# EAGLE board zero_board (EAGLE 9.6.2)
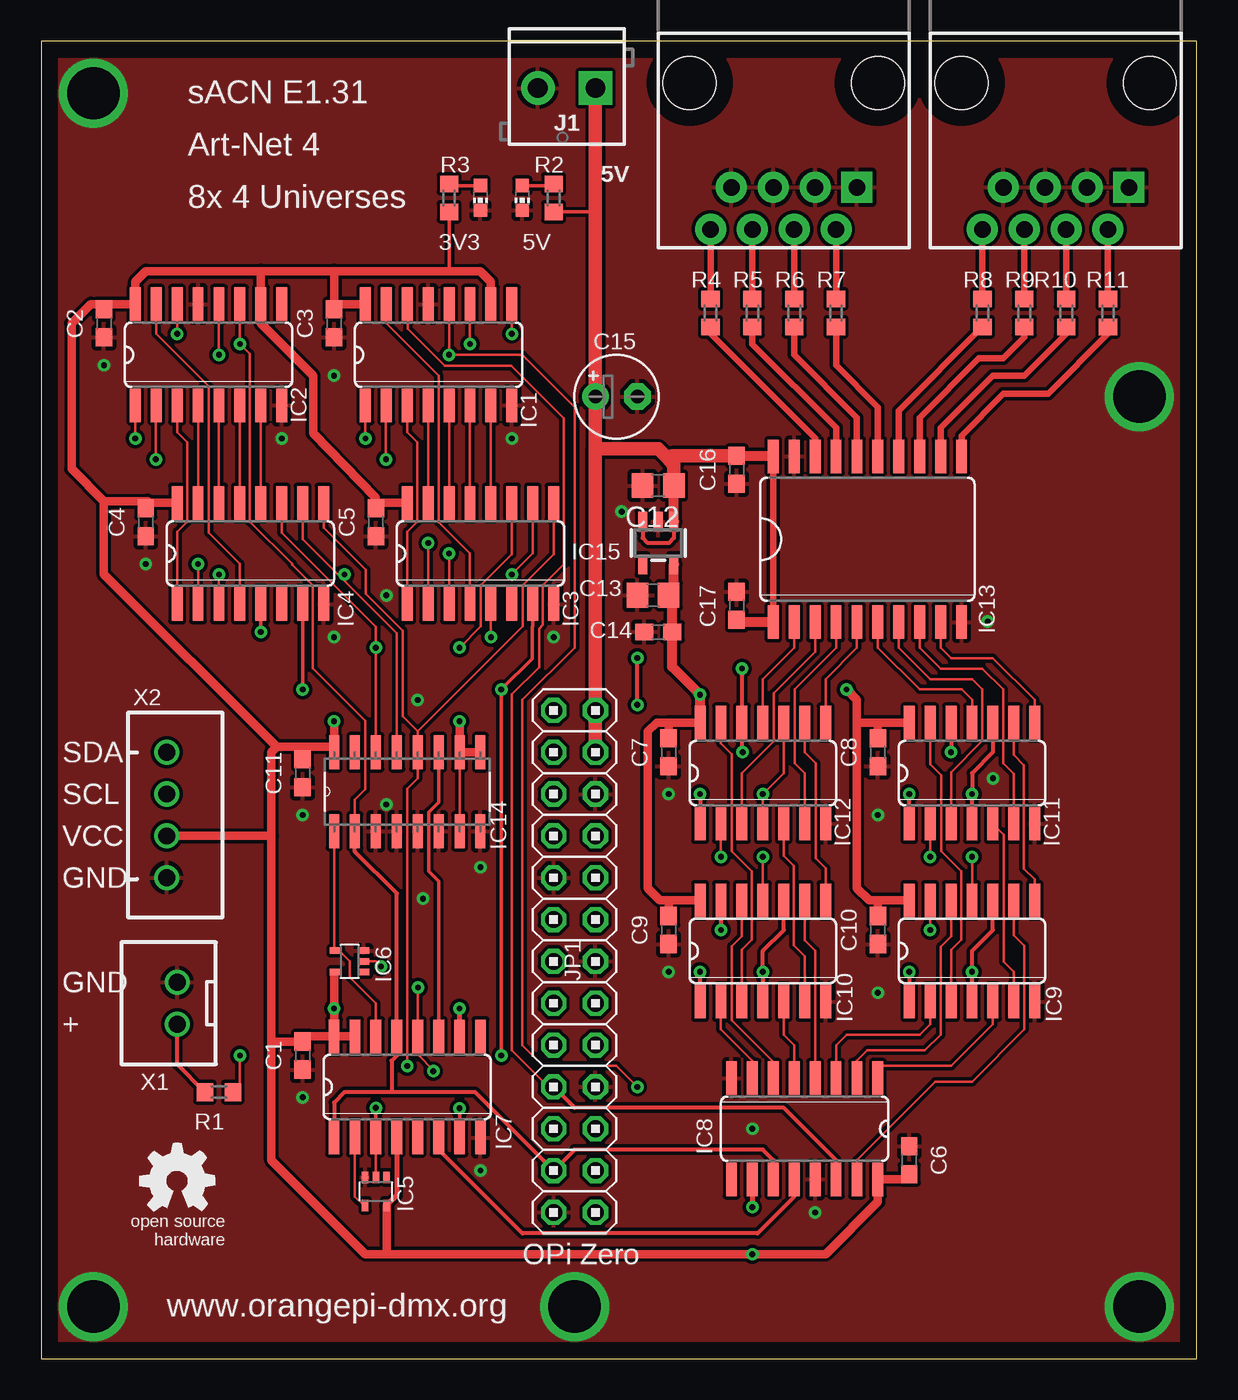
[diagram p0: board, top side]
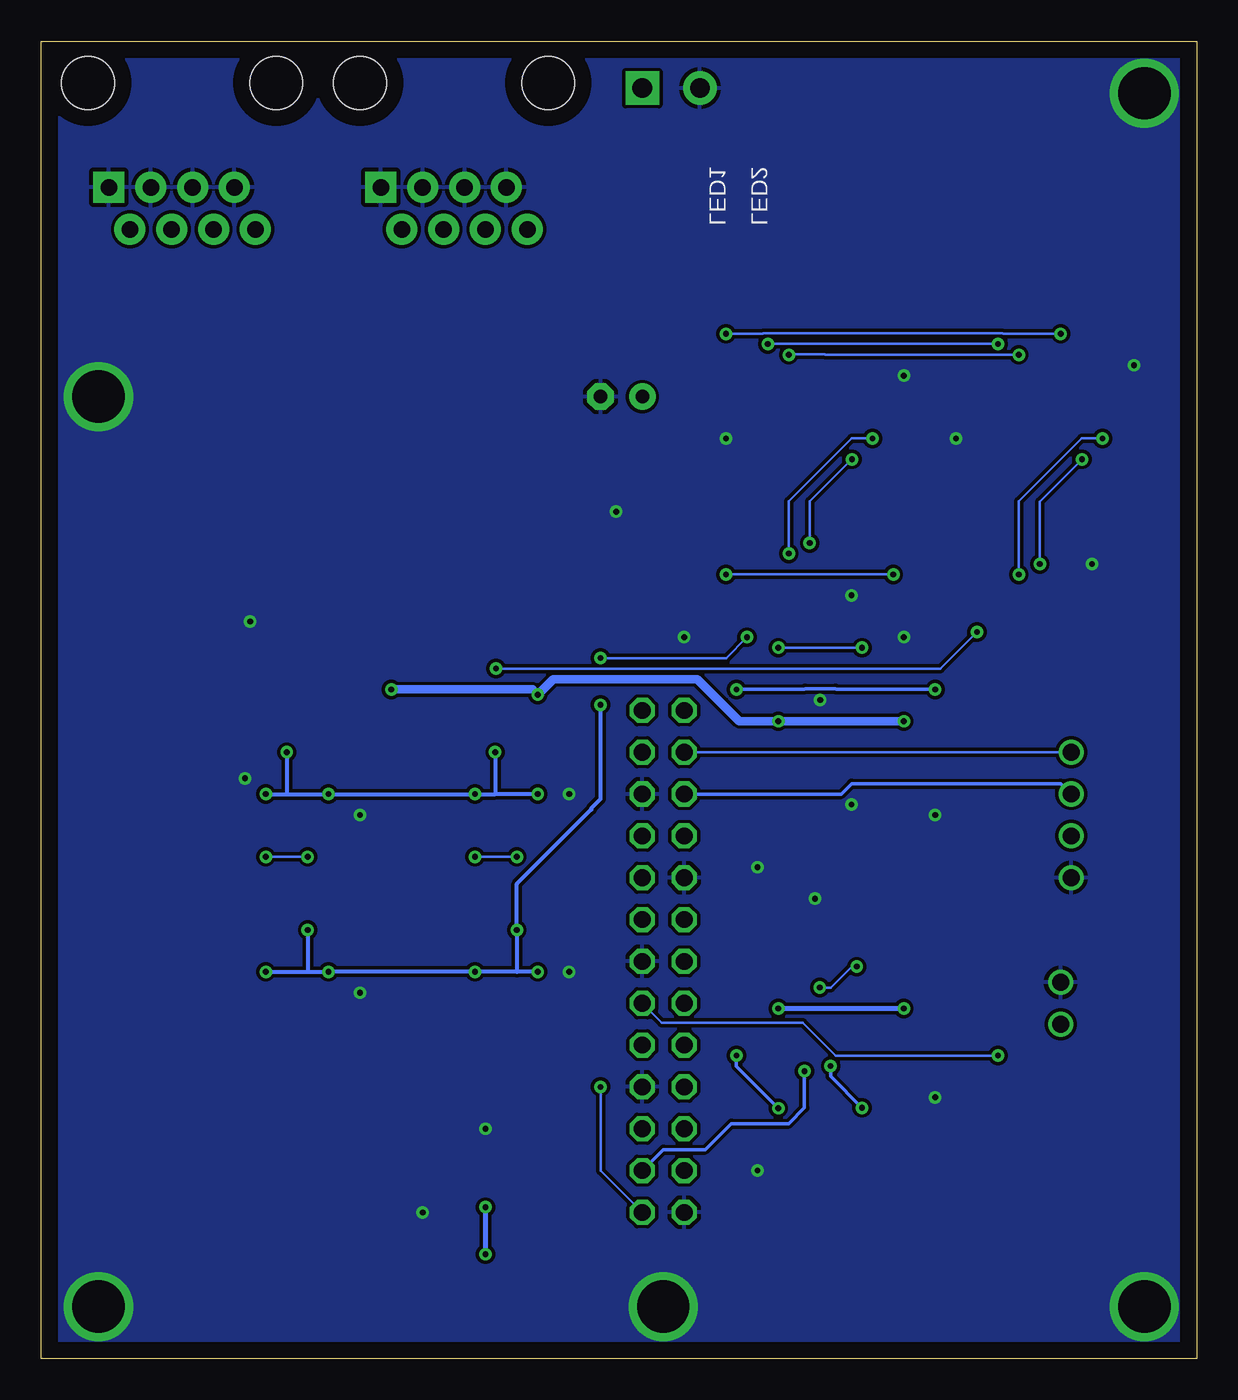
[diagram p1: board, bottom side, seen from below]

Size 70.16 x 80 mm. Coordinates in mm from the lower left corner, seen from the top.
Outline: 0,0 70.16,0 70.16,80 0,80 0,0
Copper layers (1*16): Top 0.035mm / dielectric 1.5mm / Bottom 0.035mm
Design rules "default": minimum track width 6mil, minimum drill 0.35mm, track to track 6mil, track to pad 6mil, pad to pad 6mil, via to via 6mil, smd to smd 6mil, copper to edge 40mil, drill to drill 6mil, minimum pad ring 10mil, minimum via ring 8mil, stop-mask expansion 4mil, vias tented up to drill 0mil, thermal gap 10mil
Net classes: 0 default: clearance 0.205 mm

## Footprints (pad centres in the part's own frame; a part is rotated, then mirrored left to right if it is on the bottom)
C0603 = smd 1.1 x 1: 1 -0.85,0; 2 0.85,0
C0805 = smd 1.3 x 1.5: 1 -0.95,0; 2 0.95,0
E2,5-5 = drill 0.813 pad 1.6: + -1.27,0 | drill 0.813 pad 1.6 octagon: - 1.27,0
SO16 = smd 0.66 x 2.032: 1 -4.445,-3.073; 2 -3.175,-3.073; 3 -1.905,-3.073; 4 -0.635,-3.073; 5 0.635,-3.073; 6 1.905,-3.073; 7 3.175,-3.073; 8 4.445,-3.073; 9 4.445,3.073; 10 3.175,3.073; 11 1.905,3.073; 12 0.635,3.073; 13 -0.635,3.073; 14 -1.905,3.073; 15 -3.175,3.073; 16 -4.445,3.073
SC70-5 = smd 0.4 x 0.7: 1 -0.65,-0.85; 2 0,-0.85; 3 0.65,-0.85; 4 0.65,0.85; 5 -0.65,0.85
SO14 = smd 0.66 x 2.032: 1 -3.81,-3.073; 2 -2.54,-3.073; 3 -1.27,-3.073; 4 0,-3.073; 5 1.27,-3.073; 6 2.54,-3.073; 7 3.81,-3.073; 8 3.81,3.073; 9 2.54,3.073; 10 1.27,3.073; 11 0,3.073; 12 -1.27,3.073; 13 -2.54,3.073; 14 -3.81,3.073
SO20W = smd 0.66 x 2.032: 1 -5.715,-5.029; 2 -4.445,-5.029; 3 -3.175,-5.029; 4 -1.905,-5.029; 5 -0.635,-5.029; 6 0.635,-5.029; 7 1.905,-5.029; 8 3.175,-5.029; 9 4.445,-5.029; 10 5.715,-5.029; 11 5.715,5.029; 12 4.445,5.029; 13 3.175,5.029; 14 1.905,5.029; 15 0.635,5.029; 16 -0.635,5.029; 17 -1.905,5.029; 18 -3.175,5.029; 19 -4.445,5.029; 20 -5.715,5.029
SOIC127P600X175-16N = smd 2.057 x 0.61: 1 -4.801,8.89; 2 -4.801,7.62; 3 -4.801,6.35; 4 -4.801,5.08; 5 -4.801,3.81; 6 -4.801,2.54; 7 -4.801,1.27; 8 -4.801,0; 9 0,0; 10 0,1.27; 11 0,2.54; 12 0,3.81; 13 0,5.08; 14 0,6.35; 15 0,7.62; 16 0,8.89
SOT23-5 = smd 0.55 x 1.2: 1 -0.95,-1.3; 2 0,-1.3; 3 0.95,-1.3; 4 0.95,1.3; 5 -0.95,1.3
SCREWTERMINAL-3.5MM-2 = drill 1.2 pad 2.032 square: 1 0,0 | drill 1.2 pad 2.032: 2 3.5,0
RJ45-8 = drill 1 pad 1.88 square: 1 -4.445,6.35 | drill 1 pad 1.88: 2 -3.175,8.89; 3 -1.905,6.35; 4 -0.635,8.89; 5 0.635,6.35; 6 1.905,8.89; 7 3.175,6.35; 8 4.445,8.89 | hole 3.2: -5.715,0; 5.715,0
2X13 = drill 1.016 octagon: 1 -15.24,-1.27; 2 -15.24,1.27; 3 -12.7,-1.27; 4 -12.7,1.27; 5 -10.16,-1.27; 6 -10.16,1.27; 7 -7.62,-1.27; 8 -7.62,1.27; 9 -5.08,-1.27; 10 -5.08,1.27; 11 -2.54,-1.27; 12 -2.54,1.27; 13 0,-1.27; 14 0,1.27; 15 2.54,-1.27; 16 2.54,1.27; 17 5.08,-1.27; 18 5.08,1.27; 19 7.62,-1.27; 20 7.62,1.27; 21 10.16,-1.27; 22 10.16,1.27; 23 12.7,-1.27; 24 12.7,1.27; 25 15.24,-1.27; 26 15.24,1.27
CHIP-LED0603 = smd 0.8 x 0.8: A 0,-0.75; C 0,0.75
R0603 = smd 1 x 1.1: 1 -0.85,0; 2 0.85,0
JST-XH-02-PACKAGE-ROUND-PAD = drill 1.016: 1 -1.27,0; 2 1.27,0
JST-XH-04-PACKAGE-ROUND-PAD = drill 1.016: 1 -3.81,0; 2 -1.27,0; 3 1.27,0; 4 3.81,0

## Placement (x,y rotation side)
C1  100n  [C0603]  15.88,18.41 270 top
C2  100n  [C0603]  3.81,62.87 270 top
C3  100n  [C0603]  17.78,62.87 270 top
C4  100n  [C0603]  6.35,50.8 270 top
C5  100n  [C0603]  20.32,50.8 270 top
C6  100n  [C0603]  52.7,12.06 90 top
C7  100n  [C0603]  38.1,36.83 270 top
C8  100n  [C0603]  50.8,36.83 270 top
C9  100n  [C0603]  38.1,26.04 270 top
C10  100n  [C0603]  50.8,26.04 270 top
C11  100n  [C0603]  15.88,35.56 270 top
C12  10uF  [C0805]  37.46,53.02 180 top
C13  10uF  [C0805]  37.15,46.35 180 top
C14  100n  [C0603]  37.46,44.13 180 top
C15  100uF  [E2,5-5]  34.92,58.42 0 top
C16  100n  [C0603]  42.23,53.98 270 top
C17  100n  [C0603]  42.23,45.72 90 top
GOLD_ORB_SM1  OSHWLOGOLOGO5MM  [OSHW_5MM]  8.26,10.79 0 top
IC1  74HC595  [SO16]  24.13,60.96 0 top
IC2  74HC595  [SO16]  10.16,60.96 0 top
IC3  74HC151  [SO16]  26.67,48.9 0 top
IC4  74HC151  [SO16]  12.7,48.9 0 top
IC5  74LVC1G04DCK  [SC70-5]  20.32,10.16 180 top
IC6  74LVC1G04DCK  [SC70-5]  18.73,24.13 90 top
IC7  74HC112  [SO16]  22.23,16.51 0 top
IC8  74AHC595  [SO16]  46.35,13.97 180 top
IC9  74HC32  [SO14]  56.52,24.77 0 top
IC10  74HC32  [SO14]  43.81,24.77 0 top
IC11  74HC08  [SO14]  56.52,35.56 0 top
IC12  74HC08  [SO14]  43.81,35.56 0 top
IC13  74HCT245  [SO20W]  50.16,49.76 0 top
IC14  SN74HC161  [SOIC127P600X175-16N]  26.67,36.83 90 top
IC15  AP2112-3.3  [SOT23-5]  37.46,49.53 180 top
J1  5V  [SCREWTERMINAL-3.5MM-2]  33.66,77.15 180 top
J2  RJ45  [RJ45-8]  45.09,77.47 180 top
J3  RJ45  [RJ45-8]  61.59,77.47 180 top
JP1  OPi Zero  [2X13]  32.38,24.13 270 top
LED1  5V  [CHIP-LED0603]  29.21,70.48 180 top
LED2  3V3  [CHIP-LED0603]  26.67,70.48 180 top
R1  1K  [R0603]  10.79,16.19 180 top
R2  1K  [R0603]  31.12,70.48 90 top
R3  1K  [R0603]  24.77,70.48 90 top
R4  100  [R0603]  40.64,63.5 90 top
R5  100  [R0603]  43.18,63.5 90 top
R6  100  [R0603]  45.72,63.5 90 top
R7  100  [R0603]  48.26,63.5 90 top
R8  100  [R0603]  57.15,63.5 90 top
R9  100  [R0603]  59.69,63.5 90 top
R10  100  [R0603]  62.23,63.5 90 top
R11  100  [R0603]  64.77,63.5 90 top
X1  JST-XH-02-PIN-ROUND-PAD  [JST-XH-02-PACKAGE-ROUND-PAD]  8.26,21.59 90 top
X2  JST-XH-04-PIN-ROUND-PAD  [JST-XH-04-PACKAGE-ROUND-PAD]  7.62,33.02 270 top

## Library data of the parts
C1-C17 = rcl; SPICEPREFIX: C
GOLD_ORB_SM1 = oshw
IC1-IC4 IC7 IC8 IC11-IC13 = 74xx-eu
IC5 IC6 = 74xx-little-us
IC9 IC10 = 74xx-us
IC14 = SN74HC161DR; AVAILABILITY: Unavailable; DESCRIPTION: 4-Bit Synchronous Binary Counters 16-SOIC -40 to 85; MF: Texas Instruments; MP: SN74HC161DR; PACKAGE: SOIC-16 Texas Instruments; PRICE: None
IC15 = microbuilder
J1 = SparkFun-Connectors; PROD_ID: CONN-08399
J2 J3 = SparkFun-Connectors; PROD_ID: CONN-08506; SF_ID: PRT-00643
JP1 = pinhead
LED1 LED2 = led
R1-R11 = rcl
X1 X2 = Rembrandt Electronics - JST XH Connectors v1-0

## Nets
+5V: C12.1 C15.+ C16.1 C17.1 IC13.1 IC13.20 IC15.1 IC15.3 J1.1 JP1.2 JP1.4 R2.1
/G_151: IC3.7 IC4.7 IC7.7
/SPI_CS0: IC6.2 IC7.12 JP1.24
/SPI_CS1: IC1.12 IC2.12 JP1.26
A: IC3.11 IC4.11 IC14.14
A1: IC12.11 IC13.2
A2: IC12.3 IC13.3
A3: IC12.6 IC13.4
A4: IC12.8 IC13.5
A5: IC11.11 IC13.6
A6: IC11.3 IC13.7
A7: IC11.6 IC13.8
A8: IC11.8 IC13.9
B: IC3.10 IC4.10 IC14.13
C: IC3.9 IC4.9 IC5.2 IC7.3 IC14.12
D: IC7.11 IC14.11
GND: C1.2 C2.2 C3.2 C4.2 C5.2 C6.2 C7.2 C8.2 C9.2 C10.2 C11.2 C12.2 C13.2 C14.2 C15.- C16.2 C17.2 IC1.8 IC1.13 IC2.8 IC2.13 IC3.8 IC4.8 IC5.3 IC6.3 IC7.8 IC8.8 IC8.13 IC9.7 IC10.7 IC11.7 IC12.7 IC13.10 IC13.19 IC14.3 IC14.4 IC14.5 IC14.6 IC14.8 IC15.2 J1.2 J2.1 J2.3 J2.5 J2.7 J3.1 J3.3 J3.5 J3.7 JP1.6 JP1.9 JP1.14 JP1.20 JP1.25 LED1.C LED2.C X1.2 X2.4
LED: R1.2 X1.1
N$1: IC10.11 IC12.2
N$2: IC10.6 IC12.5
N$3: IC10.8 IC12.9
N$4: IC10.3 IC12.13
N$5: IC9.8 IC11.9
N$6: IC9.6 IC11.5
N$7: IC9.11 IC11.2
N$8: JP1.16 R1.1
N$9: IC13.17 R5.1
N$10: IC13.16 R6.1
N$11: IC1.15 IC3.4
N$12: IC1.1 IC3.3
N$13: IC1.2 IC3.2
N$14: IC1.3 IC3.1
N$15: IC5.4 IC7.2
N$16: IC9.3 IC11.13
N$17: IC13.15 R7.1
N$18: IC13.18 R4.1
N$19: IC2.15 IC4.4
N$20: IC13.14 R8.1
N$21: IC1.4 IC3.15
N$22: IC1.5 IC3.14
N$23: IC1.6 IC3.13
N$24: IC1.7 IC3.12
N$25: IC2.1 IC4.3
N$26: IC13.13 R9.1
N$27: IC2.2 IC4.2
N$28: IC2.3 IC4.1
N$29: IC2.4 IC4.15
N$30: IC2.5 IC4.14
N$31: IC2.6 IC4.13
N$32: IC2.7 IC4.12
N$33: IC13.12 R10.1
N$34: IC13.11 R11.1
N$35: LED1.A R2.2
N$36: LED2.A R3.2
N$44: IC1.9 IC2.14
O1: J2.8 R4.2
O2: J2.6 R5.2
O3: J2.4 R6.2
O4: J2.2 R7.2
O5: J3.8 R8.2
O6: J3.6 R9.2
O7: J3.4 R10.2
O8: J3.2 R11.2
QA: IC8.15 IC9.9
QB: IC8.1 IC9.5
QC: IC8.2 IC9.12
QD: IC8.3 IC9.2
QE: IC8.4 IC10.9
QF: IC8.5 IC10.5
QG: IC8.6 IC10.12
QH: IC8.7 IC10.2
RCK: IC7.6 IC8.12
SCL: JP1.5 X2.2
SDA: JP1.3 X2.1
SPI_CLK: IC1.11 IC2.11 IC7.1 IC7.13 IC8.11 IC14.2 JP1.23
SPI_CS0: IC6.4 IC7.14 IC14.1
SPI_MOSI: IC1.14 IC8.14 JP1.19
T0H: IC3.5 IC9.1 IC9.4 IC9.10 IC9.13 IC10.1 IC10.4 IC10.10 IC10.13
T1H: IC4.5 IC11.1 IC11.4 IC11.10 IC11.12 IC12.1 IC12.4 IC12.10 IC12.12
VCC: C1.1 C2.1 C3.1 C4.1 C5.1 C6.1 C7.1 C8.1 C9.1 C10.1 C11.1 C13.1 C14.1 IC1.10 IC1.16 IC2.10 IC2.16 IC3.16 IC4.16 IC5.5 IC6.5 IC7.4 IC7.10 IC7.15 IC7.16 IC8.10 IC8.16 IC9.14 IC10.14 IC11.14 IC12.14 IC14.7 IC14.9 IC14.10 IC14.16 IC15.5 R3.1 X2.3

## Tracks (layer width: path | path; a pad name or v marks a point on that pad's centre or on a via)
+5V
  Top 0.203: R2.1 33.44,69.64 33.66,69.85
  Top 0.254: IC15.1 38.42,49.84 38.1,49.53 36.83,49.53 36.52,49.84 IC15.3
  Top 0.406: IC13.20 IC13.1
  Top 0.61: IC13.20 42.27,54.79 C16.1 | IC13.1 42.37,44.73 C17.1 | IC15.1 C12.1
  Top 0.813: J1.1 33.66,69.85 C15.+ 33.66,55.24 | 33.66,55.24 37.46,55.24 38.1,54.61 | 38.1,54.61 38.41,54.3 C12.1 | C16.1 38.31,54.83 38.1,54.61 | JP1.4 JP1.2 33.66,55.24
/G_151  (via drill 0.35)
  Top 0.203: v15.88,40.64 IC4.7 | IC3.7 29.85,44.49 29.82,44.46 29.82,42.52 v27.94,40.64 v27.94,18.41 | IC7.7 v25.4,15.21
  Bottom 0.203: v27.94,40.64 23.83,40.64 23.78,40.69 21.94,40.69 21.89,40.64 v15.88,40.64 | v25.4,15.21 27.94,17.75 v27.94,18.41
/SPI_CS0  (via drill 0.35)
  Top 0.152: IC6.2 20.32,24.13 v20.64,23.81 | v22.88,22.54 22.86,22.52 IC7.12 22.88,19.56 22.88,18.45 23.81,17.52 v23.81,17.46
  Bottom 0.152: v20.64,23.81 20.96,23.81 22.23,22.54 v22.88,22.54
  Bottom 0.203: JP1.24 32.38,12.7 29.85,12.7 28.26,14.29 24.77,14.29 23.81,15.24 v23.81,17.46
/SPI_CS1  (via drill 0.35)
  Top 0.152: IC1.12 v24.77,60.96 29.21,60.96 32.38,57.78 32.38,43.18 29.21,40.01 29.21,19.05 30.48,17.78 34.92,17.78 v36.2,16.51 | IC2.12 v10.79,60.96
  Bottom 0.152: JP1.26 36.2,11.43 v36.2,16.51 | v10.79,60.96 22.56,60.96 22.59,60.98 24.77,60.98 v24.77,60.96
A  (via drill 0.35)
  Top 0.152: v25.4,43.18 26.69,44.47 26.69,46.95 28.58,48.84 IC3.11 | IC14.14 v20.32,43.18 20.32,44.45 14.61,50.16 IC4.11
  Bottom 0.152: v25.4,43.18 v20.32,43.18
A1
  Top 0.152: IC12.11 43.81,41.27 45.72,43.18 IC13.2
A2
  Top 0.152: IC12.3 42.54,35.56 44.47,37.49 44.47,40.4 46.99,42.92 IC13.3
A3
  Top 0.152: IC12.6 46.35,35.56 45.74,36.17 45.74,40.66 48.26,43.18 IC13.4
A4
  Top 0.152: IC12.8 47.62,41.27 49.53,43.18 IC13.5
A5
  Top 0.152: IC13.6 50.8,43.18 53.34,40.64 55.88,40.64 56.52,40.01 IC11.11
A6
  Top 0.152: IC11.3 55.24,35.62 57.15,37.52 57.15,40.64 56.52,41.27 53.98,41.27 52.07,43.18 IC13.7
A7
  Top 0.152: IC11.6 59.05,35.52 58.42,36.16 58.42,40.64 57.15,41.91 54.61,41.91 53.34,43.18 53.34,44.68 53.36,44.71 IC13.8
A8
  Top 0.152: IC11.8 60.32,40.01 57.78,42.55 55.24,42.55 54.61,43.18 IC13.9
B  (via drill 0.35)
  Top 0.152: IC3.10 29.85,48.9 v28.58,47.62 | IC14.13 21.59,44.05 18.02,47.62 | 18.02,47.62 15.88,49.77 IC4.10 | v18.42,47.62 18.02,47.62
  Bottom 0.152: v28.58,47.62 v18.42,47.62
C  (via drill 0.35)
  Top 0.152: IC3.9 31.12,48.84 29.23,46.95 29.23,44.47 22.86,38.1 | 22.86,38.1 IC14.12 22.86,35.24 22.23,34.61 v22.23,17.78 | 22.86,38.1 21.95,39.01 21.95,44.2 19.71,46.44 19.71,47.9 17.15,50.46 IC4.9 | IC7.3 IC5.2
  Top 0.203: IC7.3 v20.32,15.24
  Bottom 0.203: v20.32,15.24 22.23,17.14 v22.23,17.78
D
  Top 0.203: IC7.11 24.13,28.99 23.52,29.6 23.52,33.19 24.13,33.8 IC14.11
GND  (via drill 0.35, 3.17)
  other vias: 15.88,33.02 3.17,3.17 66.68,3.17 66.68,58.42 3.17,76.83 38.1,23.5 38.1,34.29 50.8,33.02 50.8,22.23 43.18,13.97 32.38,3.17 15.88,15.88 57.78,35.24 3.81,60.33 6.35,48.26 28.58,55.88 31.12,43.81 17.78,43.81 22.86,40.01 14.61,55.88 17.78,59.69 20.96,46.35 35.24,51.44 23.18,27.94 20.96,33.66 46.99,8.89 26.67,11.43 26.67,29.84 57.47,44.77
  pour Top: 0,0 70.48,0 70.48,80.01 0,80.01
  pour Bottom: 0,0 70.48,0 70.48,80.01 0,80.01
LED
  Top 0.254: R1.2 8.26,17.88 X1.1
N$1  (via drill 0.35)
  Top 0.152: IC12.2 v41.27,30.48 | IC10.11 v43.81,30.48
  Bottom 0.152: v41.27,30.48 v43.81,30.48
N$2
  Top 0.152: IC12.5 45.09,30.54 45.7,29.92 45.7,25.11 46.35,24.45 IC10.6
N$3
  Top 0.152: IC10.8 47.62,29.79 47.01,30.4 47.01,36.17 46.35,36.83 IC12.9
N$4
  Top 0.152: IC12.13 41.27,37.36 41.93,36.7 41.93,30.83 43.16,29.61 43.16,25.44 42.54,24.82 IC10.3
N$5
  Top 0.152: IC9.8 60.32,29.11 59.67,29.77 59.67,36.05 59.05,36.66 IC11.9
N$6
  Top 0.152: IC11.5 58.44,31.83 58.44,24.11 59.05,23.5 IC9.6
N$7  (via drill 0.35)
  Top 0.152: IC11.2 v53.98,30.48 | IC9.11 v56.52,30.48
  Bottom 0.152: v53.98,30.48 v56.52,30.48
N$8  (via drill 0.35)
  Top 0.152: R1.1 12.06,16.61 v12.06,18.41
  Bottom 0.152: v12.06,18.41 21.93,18.41 23.92,20.41 32.48,20.41 JP1.16
N$9
  Top 0.406: IC13.17 48.26,56.52 43.18,61.59 R5.1
N$10
  Top 0.406: IC13.16 49.53,57.15 45.72,60.96 R6.1
N$11
  Top 0.152: IC3.4 26.04,48.9 24.13,50.8 24.13,59.69 20.96,62.87 IC1.15
N$12  (via drill 0.35)
  Top 0.152: v19.69,55.88 IC1.1 | v24.77,48.9 IC3.3
  Bottom 0.152: v19.69,55.88 20.96,55.88 24.77,52.07 v24.77,48.9
N$13  (via drill 0.35)
  Top 0.152: v20.93,54.61 20.93,57.86 IC1.2 | IC3.2 v23.5,49.53
  Bottom 0.152: v20.93,54.61 20.96,54.61 23.5,52.07 v23.5,49.53
N$14
  Top 0.152: IC3.1 22.23,50.23 22.84,50.84 22.84,55.64 22.23,56.25 IC1.3
N$15
  Top 0.152: IC5.4 19.58,9.31 19.05,9.84 IC7.2
N$16
  Top 0.152: IC11.13 53.98,36.09 54.63,35.44 54.63,30.83 55.86,29.61 55.86,25.44 55.24,24.82 IC9.3
N$17
  Top 0.406: IC13.15 50.8,57.78 48.26,60.33 R7.1
N$18
  Top 0.406: IC13.18 46.99,55.88 40.64,62.23 R4.1
N$19
  Top 0.152: IC4.4 12.06,48.26 10.16,50.16 10.16,59.05 6.98,62.23 IC2.15
N$20
  Top 0.406: IC13.14 52.07,57.57 R8.1
N$21
  Top 0.152: IC1.4 IC3.15
N$22
  Top 0.152: IC1.5 IC3.14
N$23
  Top 0.152: IC1.6 IC3.13
N$24
  Top 0.152: IC3.12 IC1.7
N$25  (via drill 0.35)
  Top 0.152: v5.71,55.88 IC2.1 | v10.79,47.62 IC4.3
  Bottom 0.152: v5.71,55.88 6.98,55.88 10.79,52.07 v10.79,47.62
N$26
  Top 0.406: IC13.13 53.34,57.15 56.93,60.74 58.42,60.74 59.69,62.02 R9.1
N$27  (via drill 0.35)
  Top 0.152: v6.96,54.61 6.96,57.86 IC2.2 | v9.53,48.26 IC4.2
  Bottom 0.152: v6.96,54.61 9.53,52.05 v9.53,48.26
N$28
  Top 0.152: IC4.1 8.26,50.23 8.87,50.84 8.87,55.64 8.26,56.25 IC2.3
N$29
  Top 0.152: IC4.15 IC2.4
N$30
  Top 0.152: IC4.14 IC2.5
N$31
  Top 0.152: IC4.13 IC2.6
N$32
  Top 0.152: IC4.12 IC2.7
N$33
  Top 0.406: IC13.12 54.61,56.52 57.78,59.69 59.69,59.69 62.23,62.23 R10.1
N$34
  Top 0.406: IC13.11 55.88,56.06 58.42,58.6 61.14,58.6 64.77,62.23 R11.1
N$35
  Top 0.203: LED1.A 31.02,71.23 R2.2
N$36
  Top 0.203: LED2.A 24.87,71.23 R3.2
N$44  (via drill 0.35)
  Top 0.152: IC1.9 v28.58,62.23 | v8.26,62.23 IC2.14
  Bottom 0.152: v28.58,62.23 26.36,62.23 26.31,62.28 11.79,62.28 11.74,62.23 v8.26,62.23
O1
  Top 0.406: R4.2 J2.8
O2
  Top 0.406: R5.2 J2.6
O3
  Top 0.406: R6.2 J2.4
O4
  Top 0.406: R7.2 J2.2
O5
  Top 0.406: R8.2 J3.8
O6
  Top 0.406: R9.2 J3.6
O7
  Top 0.406: R10.2 J3.4
O8
  Top 0.406: R11.2 J3.2
QA
  Top 0.152: IC8.15 49.53,12.06 54.29,16.83 56.52,16.83 59.69,20 59.69,25.08 59.05,25.72 IC9.9
QB
  Top 0.152: IC9.5 57.78,20.32 55.24,17.78 50.8,17.78 IC8.1
QC
  Top 0.152: IC9.12 55.24,25.65 54.61,25.01 54.61,19.68 53.66,18.73 50.16,18.73 49.53,18.1 IC8.2
QD
  Top 0.152: IC9.2 53.98,20.32 53.34,19.68 48.89,19.68 48.26,19.05 IC8.3
QE
  Top 0.152: IC8.4 46.99,24.77 46.35,25.4 IC10.9
QF
  Top 0.152: IC8.5 45.72,19.05 45.09,19.68 IC10.5
QG
  Top 0.152: IC10.12 42.54,25.65 41.93,25.04 41.93,20.56 44.45,18.04 IC8.6
QH
  Top 0.152: IC10.2 41.27,20 43.18,18.1 IC8.7
RCK
  Top 0.254: IC7.6 24.13,12.7 29.21,7.62 43.5,7.62 45.72,9.84 IC8.12
SCL
  Bottom 0.203: JP1.5 21.59,34.29 20.96,34.92 8.26,34.92 X2.2
SDA
  Bottom 0.152: JP1.3 X2.1
SPI_CLK  (via drill 0.35)
  Top 0.152: IC14.2 19.05,33.93 19.69,34.57 19.69,38.73 16.49,41.93 16.49,46.95 15.24,48.2 15.24,48.26 12.68,50.82 12.68,61.01 v12.06,61.62 IC2.11 | IC1.11 v26.04,61.62
  Top 0.254: IC8.11 44.45,12.06 43.81,12.7 32.38,12.7 JP1.23 26.35,16.19 21.27,16.19 | 21.27,16.19 18.42,16.19 17.78,15.56 IC7.1 | 21.27,16.19 21.27,18.1 21.59,18.41 IC7.13 21.59,28.26 19.05,30.8 IC14.2
  Bottom 0.152: v26.04,61.62 v12.06,61.62
SPI_CS0
  Top 0.152: IC7.14 20.32,21.59 18.73,23.18 18.73,24.13 18.08,24.78 IC6.4 17.78,24.88 IC14.1
SPI_MOSI
  Top 0.152: JP1.19 30.8,16.51 28.58,18.73 28.58,40.34 30.23,41.99 30.23,44.33 30.46,44.56 30.46,46.97 31.73,48.24 31.73,53.1 31.72,53.11 31.72,57.12 28.54,60.3 24.49,60.3 22.25,62.54 22.25,64.01 IC1.14
  Top 0.254: IC8.14 48.26,12.06 45.09,15.24 32.38,15.24 JP1.19
T0H  (via drill 0.35)
  Top 0.152: v41.27,26.04 | IC9.13 v53.98,26.04 v53.97,26.04 | v27.31,43.81 IC3.5
  Top 0.254: IC9.4 v56.52,23.5 56.52,24.77 57.78,26.04 IC9.10 | v52.7,23.5 IC9.1 | IC10.1 v40,23.5 | IC10.4 v43.81,23.5 43.81,24.77 45.09,26.04 IC10.10 | IC10.13 v41.27,26.04 | v36.2,39.71 v36.2,42.55
  Bottom 0.152: v41.27,26.04 v41.27,26.03 | v53.97,26.04 v53.98,26.03 | v36.2,42.55 28.58,42.55 v27.31,43.81
  Bottom 0.254: v56.52,23.5 53.98,23.5 | 53.98,23.5 v52.7,23.5 v43.81,23.5 41.27,23.5 | v40,23.5 41.27,23.5 | v41.27,26.03 41.27,23.5 | v53.98,26.03 53.98,23.5 | v41.27,26.04 41.27,28.84 36.75,33.36 36.75,33.43 36.2,33.99 v36.2,39.71
T1H  (via drill 0.35)
  Top 0.152: IC12.10 45.09,35.56 v43.81,34.29 IC12.4
  Top 0.203: v13.33,44.13 IC4.5
  Top 0.254: IC11.10 57.78,36.83 56.52,35.56 v56.52,34.29 IC11.4 | IC11.1 v52.7,34.29 | v40,34.29 IC12.1 | IC11.12 v55.24,36.83 | v42.54,41.91 IC12.12 42.54,36.83 v42.59,36.83
  Bottom 0.152: v42.54,41.91 36.49,41.91 36.47,41.89 15.58,41.89 v13.33,44.13
  Bottom 0.254: 42.59,34.29 v43.81,34.29 v52.7,34.29 55.24,34.29 | v56.52,34.29 55.24,34.29 | v55.24,36.83 55.24,34.29 | v42.59,36.83 42.59,34.29 | v40,34.29 42.59,34.29
VCC  (via drill 0.35)
  Top 0.152: IC14.10 IC14.7 | 20.97,6.37 20.96,6.35 | IC6.5 17.78,23.38 | C1.1 16.19,19.58 | 14.07,19.27 13.97,19.37
  Top 0.203: R3.1 24.77,66.04 | 18.1,19.58 IC7.16
  Top 0.305: IC7.4 21.59,9.93 IC5.5 | IC7.10 v25.4,21.27 | IC8.10 v43.18,9.21
  Top 0.406: IC14.16 17.46,37.15 | 18,64.03 C3.1 | 4.03,64.03 C2.1
  Top 0.508: IC14.9 IC14.10 v25.4,38.71 | IC1.10 27.31,65.41 26.67,66.04 24.77,66.04 17.78,66.04 | 13.97,31.75 13.97,19.37 13.97,12.06 19.69,6.35 20.96,6.35 v43.18,6.35 47.62,6.35 50.8,9.53 IC8.16 52.49,10.9 C6.1 | 13.33,66.04 6.35,66.04 5.71,65.41 IC2.16 4.03,64.03 3.02,64.03 1.85,62.87 1.85,54.03 3.81,52.07 | 13.33,66.04 17.78,66.04 | 13.33,66.04 IC2.10 13.33,62.87 16.51,59.69 16.51,56.2 20.32,52.28 C5.1 20.54,51.97 IC3.16 | IC12.14 38.1,38.63 | C7.1 38.1,38.63 | 15.88,37.15 14.29,37.15 | 17.46,37.15 15.88,37.15 | X2.3 13.97,31.75 | IC1.16 18,64.03 | IC4.16 6.57,51.97 | 6.57,51.97 C4.1 | 17.78,66.04 C3.1 | C11.1 15.88,37.15 | 13.97,31.75 13.97,36.83 14.29,37.15 | IC9.14 50.8,27.84 | C10.1 50.8,27.84 | IC10.14 38.1,27.84 | 38.1,27.84 37.57,27.84 36.83,28.57 36.83,38.1 37.36,38.63 38.1,38.63 | C9.1 38.1,27.84 | v48.89,40.64 49.53,40.01 49.53,38.73 | 50.8,27.84 50.27,27.84 49.53,28.57 49.53,38.73 | IC11.14 50.8,38.63 | 50.8,38.63 49.63,38.63 49.53,38.73 | C8.1 50.8,38.63 | IC14.16 v17.78,38.71 | 3.81,52.07 3.81,47.62 14.29,37.15 | 3.81,52.07 6.47,52.07 6.57,51.97 | IC7.15 18.1,19.58 16.19,19.58 | IC5.5 20.97,6.37 | 17.78,23.38 v17.78,21.27 IC7.16 | C1.1 14.07,19.27
  Top 0.61: IC12.14 v40,40.32 38.31,42.01 C14.1 38.31,46.14 C13.1 38.41,46.67 IC15.5
  Bottom 0.305: v25.4,21.27 v17.78,21.27 | v43.18,9.21 v43.18,6.35
  Bottom 0.406: 40.32,40.64 v40,40.32
  Bottom 0.508: v48.89,40.64 40.32,40.64 | v40,40.32 39.05,41.27 30.32,41.27 27.76,38.71 v25.4,38.71 v17.78,38.71

## Text on the board
tNames: sACN E1.31 | Art-Net 4 | 8x 4 Universes | SDA | SCL | VCC | GND | GND | + | www.orangepi-dmx.org